# EAGLE board dcdctest1 (EAGLE 9.6.2)
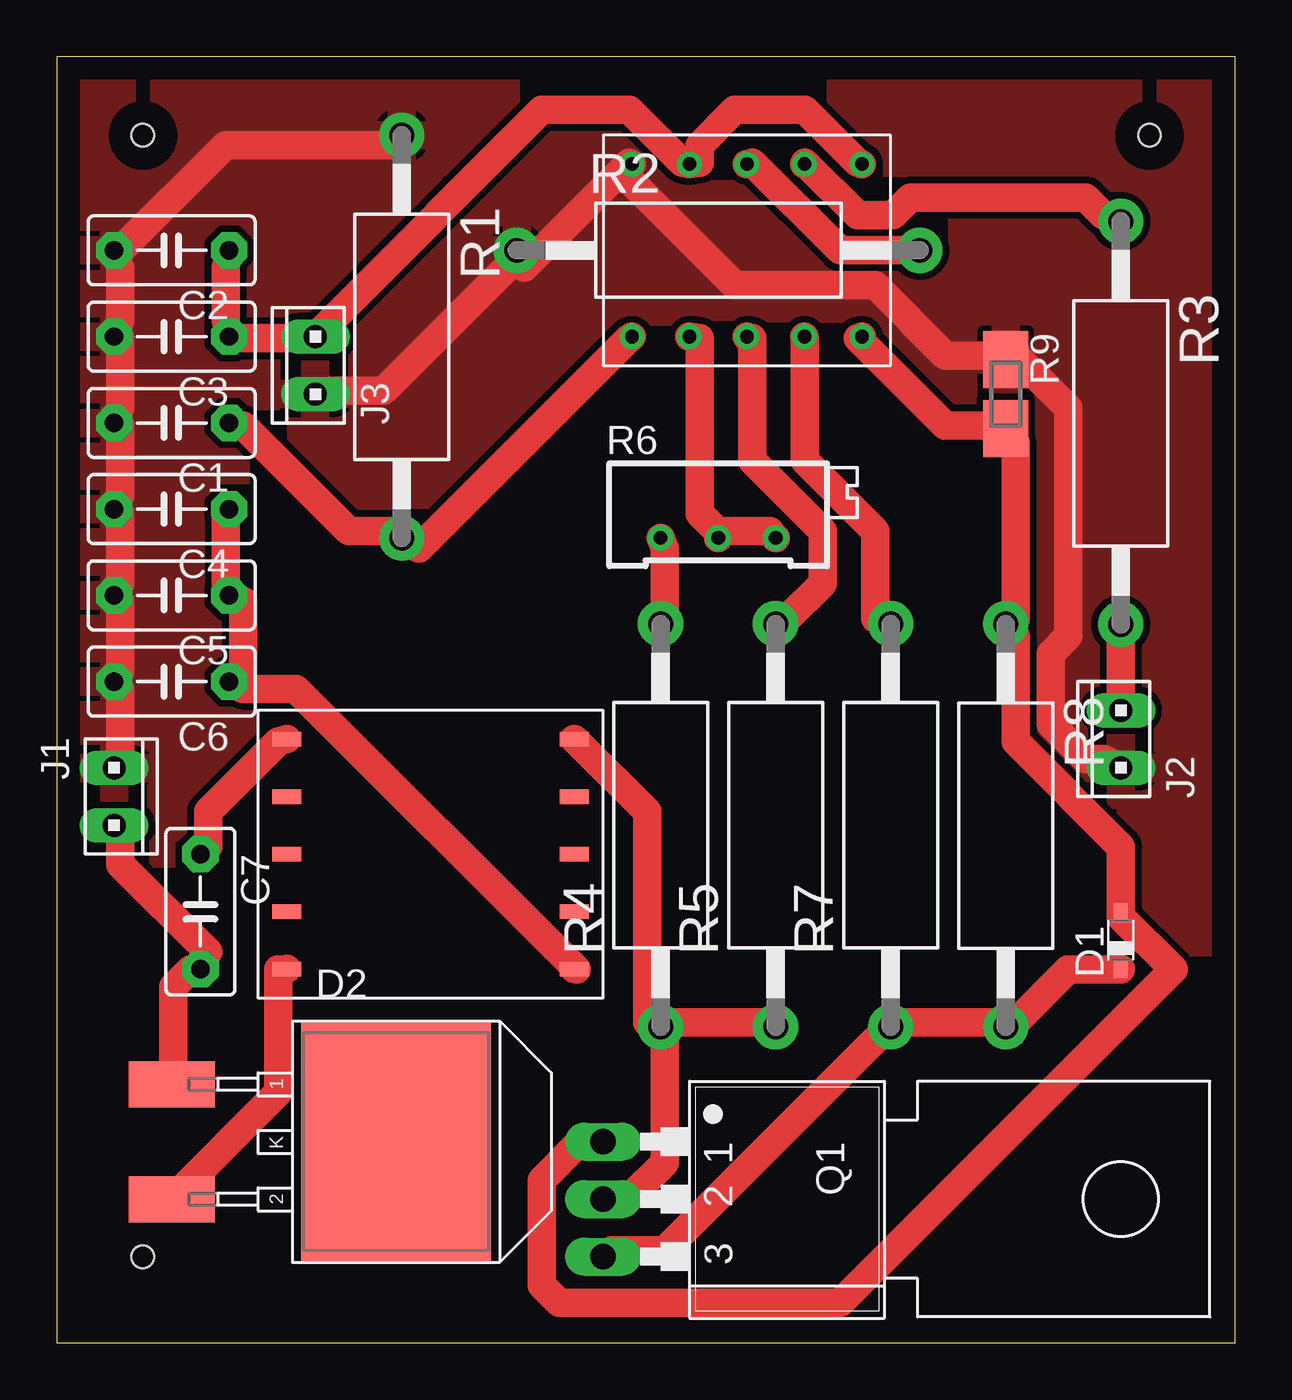
[diagram p0: board, top side]

Size 52.05 x 56.82 mm. Coordinates in mm from the lower left corner, seen from the top.
Outline: 0,0 52.05,0 52.05,56.82 0,56.82 0,0
Copper layers (1*16): Top 0.035mm / dielectric 1.5mm / Bottom 0.035mm
Design rules "default": minimum track width 6mil, minimum drill 0.35mm, track to track 6mil, track to pad 6mil, pad to pad 6mil, via to via 6mil, smd to smd 6mil, copper to edge 40mil, drill to drill 6mil, minimum pad ring 10mil, minimum via ring 8mil, stop-mask expansion 4mil, vias tented up to drill 0mil, thermal gap 10mil
Net classes: 0 default: width 1.25 mm, drill 0.5 mm, clearance 0.3 mm
Holes 1 mm at 48.26,53.34 3.81,53.34 3.81,3.81

## Footprints (pad centres in the part's own frame; a part is rotated, then mirrored left to right if it is on the bottom)
C5B3 = drill 0.813 pad 1.6 octagon: 1 -2.54,0; 2 2.54,0
SOD323_ST = smd 0.8 x 0.6: A 1.25,0; C -1.25,0
TO263AB = smd 2.032 x 3.81: 1 -2.54,0; 2 2.54,0 | smd 10.668 x 8.382: K 0,9.906
10X02MTA = drill 1.016 long: 1 1.27,0; 2 -1.27,0
TO202 = drill 1.118 long: 1 -2.54,-5.08; 2 0,-5.08; 3 2.54,-5.08 | hole 3.302: 0,17.78
AC01 = drill 1.1 pad 2: 1 -8.9,0; 2 8.9,0
RTRIM64X = drill 0.61: 1 1.27,-2.54; 2 1.27,0; 3 1.27,2.54
SMK = smd 2.5 x 2: 1 1.524,0; 2 -1.524,0
LT3750 = drill 0.6: P$1 0,12.7; P$2 0,10.16; P$3 0,7.62; P$4 0,5.08; P$5 0,2.54; P$6 7.62,12.7; P$7 7.62,10.16; P$8 7.62,7.62; P$9 7.62,5.08; P$10 7.62,2.54
32052 = smd 1.27 x 0.635: P$1 1.27,11.43; P$2 1.27,8.89; P$3 1.27,6.35; P$4 1.27,3.81; P$5 1.27,1.27; P$6 13.97,11.43; P$7 13.97,8.89; P$8 13.97,6.35; P$9 13.97,3.81; P$10 13.97,1.27

## Placement (x,y rotation side)
C1  [C5B3]  5.08,40.64 180 top
C2  [C5B3]  5.08,48.26 180 top
C3  [C5B3]  5.08,44.45 180 top
C4  [C5B3]  5.08,36.83 180 top
C5  [C5B3]  5.08,33.02 180 top
C6  [C5B3]  5.08,29.21 180 top
C7  [C5B3]  6.35,19.05 270 top
D1  BAT60J  [SOD323_ST]  46.99,17.78 90 top
D2  BY229B  [TO263AB]  5.08,8.89 270 top
J1  [10X02MTA]  2.54,24.13 270 top
J2  [10X02MTA]  46.99,26.67 90 top
J3  [10X02MTA]  11.43,43.18 90 top
Q1  BSS97  [TO202]  29.21,6.35 270 top
R1  [AC01]  15.24,44.45 270 top
R2  [AC01]  29.21,48.26 0 top
R3  [AC01]  46.99,40.64 270 top
R4  [AC01]  26.67,22.86 90 top
R5  [AC01]  31.75,22.86 90 top
R6  [RTRIM64X]  29.21,36.83 270 top
R7  [AC01]  36.83,22.86 90 top
R8  [AC01]  41.91,22.86 270 top
R9  [SMK]  41.91,41.91 270 top
U$1  [LT3750]  22.86,52.07 270 top
U$2  [32052]  24.13,27.94 180 top

## Library data of the parts
C1-C7 = capacitor-wima
D1 D2 = diode
J1-J3 = con-amp
Q1 = transistor-fet
R1-R5 R7 R8 = resistor-power; OC_FARNELL: unknown; OC_NEWARK: unknown
R6 = rcl; SPICEMODEL: X; SPICEPREFIXL: POT
R9 = resistor-shunt; OC_FARNELL: unknown; OC_NEWARK: unknown
U$1 U$2 = boostTest1215

## Nets
0: C1.2 C2.2 C3.2 C4.2 C5.2 C6.2 J1.2 J2.2 J3.2 R1.1 R2.1 R9.2 U$1.P$5
N$1: R3.1 U$1.P$2
N$2: R2.2 U$1.P$3
N$3: C2.1 C3.1 J3.1 U$1.P$1 U$1.P$4
N$4: D2.2 U$2.P$6
N$6: C1.1 R1.2 U$1.P$10
N$7: C4.1 C5.1 C6.1 U$2.P$1
N$8: Q1.2 R4.1 R5.1 U$2.P$5
N$9: R6.2 R6.3 U$1.P$9
N$10: R4.2 R6.1
N$11: R5.2 U$1.P$8
N$12: D1.A Q1.1 R8.1 R9.1 U$1.P$6
N$13: D1.C Q1.3 R7.1 R8.2
N$14: R7.2 U$1.P$7
N$15: J2.1 R3.2
N$16: C7.2 D2.1 J1.1
N$19: C7.1 U$2.P$10

## Tracks (layer width: path | path; a pad name or v marks a point on that pad's centre or on a via)
0
  Top 1.25: J1.2 2.82,25.79 2.82,28.89 C6.2 2.82,29.66 2.82,32.77 C5.2 2.82,33.54 2.82,36.64 C4.2 2.82,37.41 2.82,40.52 C1.2 2.82,41.29 2.82,44.39 C3.2 2.82,45.16 2.82,47.49 C2.2 2.82,48.27 7.47,52.91 15.22,52.91 R1.1 | 24.91,51.75 20.64,47.49 R2.1 19.87,47.49 14.45,42.06 12.12,42.06 J3.2 | 24.91,51.75 25.3,52.14 U$1.P$5 | 24.91,51.75 29.95,46.72 36.15,46.72 39.24,43.62 41.57,43.62 R9.2 42.34,43.62 44.67,41.29 44.67,31.21 43.9,30.44 43.9,27.34 45.45,25.79 46.22,25.79 J2.2
  pour Top: 0,57.15 0,0 52.07,0 52.07,57.15
N$1
  Top 1.25: U$1.P$2 33.05,52.14 35.37,49.81 36.92,49.81 37.7,50.59 45.45,50.59 46.22,49.81 R3.1
N$2
  Top 1.25: U$1.P$3 30.72,52.14 34.59,48.27 37.7,48.27 R2.2
N$3
  Top 1.25: U$1.P$1 35.37,52.14 33.05,54.47 29.95,54.47 28.39,52.91 28.39,52.14 U$1.P$4 27.62,52.14 25.3,54.47 21.42,54.47 12.12,45.16 J3.1 11.35,44.39 8.24,44.39 C3.1 7.47,45.16 7.47,47.49 C2.1
N$4
  Top 1.25: D2.2 9.79,11.06 9.79,16.49 U$2.P$6
N$6
  Top 1.25: U$1.P$10 25.3,44.39 15.99,35.09 R1.2 15.22,35.87 12.89,35.87 8.24,40.52 C1.1
N$7
  Top 1.25: C4.1 7.47,36.64 7.47,33.54 C5.1 8.24,32.77 8.24,29.66 C6.1 8.24,28.89 10.57,28.89 22.97,16.49 U$2.P$1
N$8
  Top 1.25: U$2.P$5 22.97,26.57 26.07,23.46 26.07,14.16 R4.1 | Q1.2 24.52,6.42 25.3,6.42 26.84,7.96 26.84,13.39 R4.1 | R5.1 31.5,14.16 26.84,14.16 R4.1
N$9
  Top 1.25: 29.17,35.87 28.39,36.64 28.39,44.39 U$1.P$9 | 29.17,35.87 31.5,35.87 R6.3 | 29.17,35.87 R6.2
N$10
  Top 1.25: R6.1 26.84,35.09 26.84,31.99 R4.2
N$11
  Top 1.25: U$1.P$8 30.72,44.39 30.72,38.97 33.82,35.87 33.82,33.54 32.27,31.99 R5.2
N$12
  Top 1.25: U$1.P$6 35.37,44.39 39.24,40.52 41.57,40.52 R9.1 42.34,39.74 42.34,31.99 R8.1 42.34,31.21 42.34,26.57 46.99,21.91 46.99,18.82 | 46.99,18.82 49.32,16.49 34.59,1.76 22.2,1.76 21.42,2.54 21.42,7.19 22.97,8.74 23.75,8.74 Q1.1 | 46.99,18.82 D1.A
N$13
  Top 1.25: D1.C 46.99,16.49 44.67,16.49 42.34,14.16 R8.2 41.57,14.16 36.92,14.16 R7.1 36.15,13.39 26.84,4.09 24.52,4.09 Q1.3
N$14
  Top 1.25: U$1.P$7 33.05,44.39 33.05,38.97 36.15,35.87 36.15,31.99 R7.2
N$15
  Top 1.25: J2.1 46.99,28.11 46.99,31.21 R3.2
N$16
  Top 1.25: J1.1 2.82,22.69 2.82,21.14 6.7,17.27 C7.2 5.92,16.49 5.14,15.71 5.14,11.84 D2.1
N$19
  Top 1.25: U$2.P$10 9.79,26.57 6.7,23.46 6.7,21.91 C7.1